# Altium PCB MB1367.PcbDoc (part 3 of 6)
Units mm, origin at the board's own origin, x right, y up, seen from the top; angles counter-clockwise.
Board outline 70 x 82.5 mm, 4 copper layers (Top Layer, Signal Layer 1, Signal Layer 2, Bottom Layer), stack 1.614 mm thick; 187 components, 143 nets, 802 pads, 920 vias.
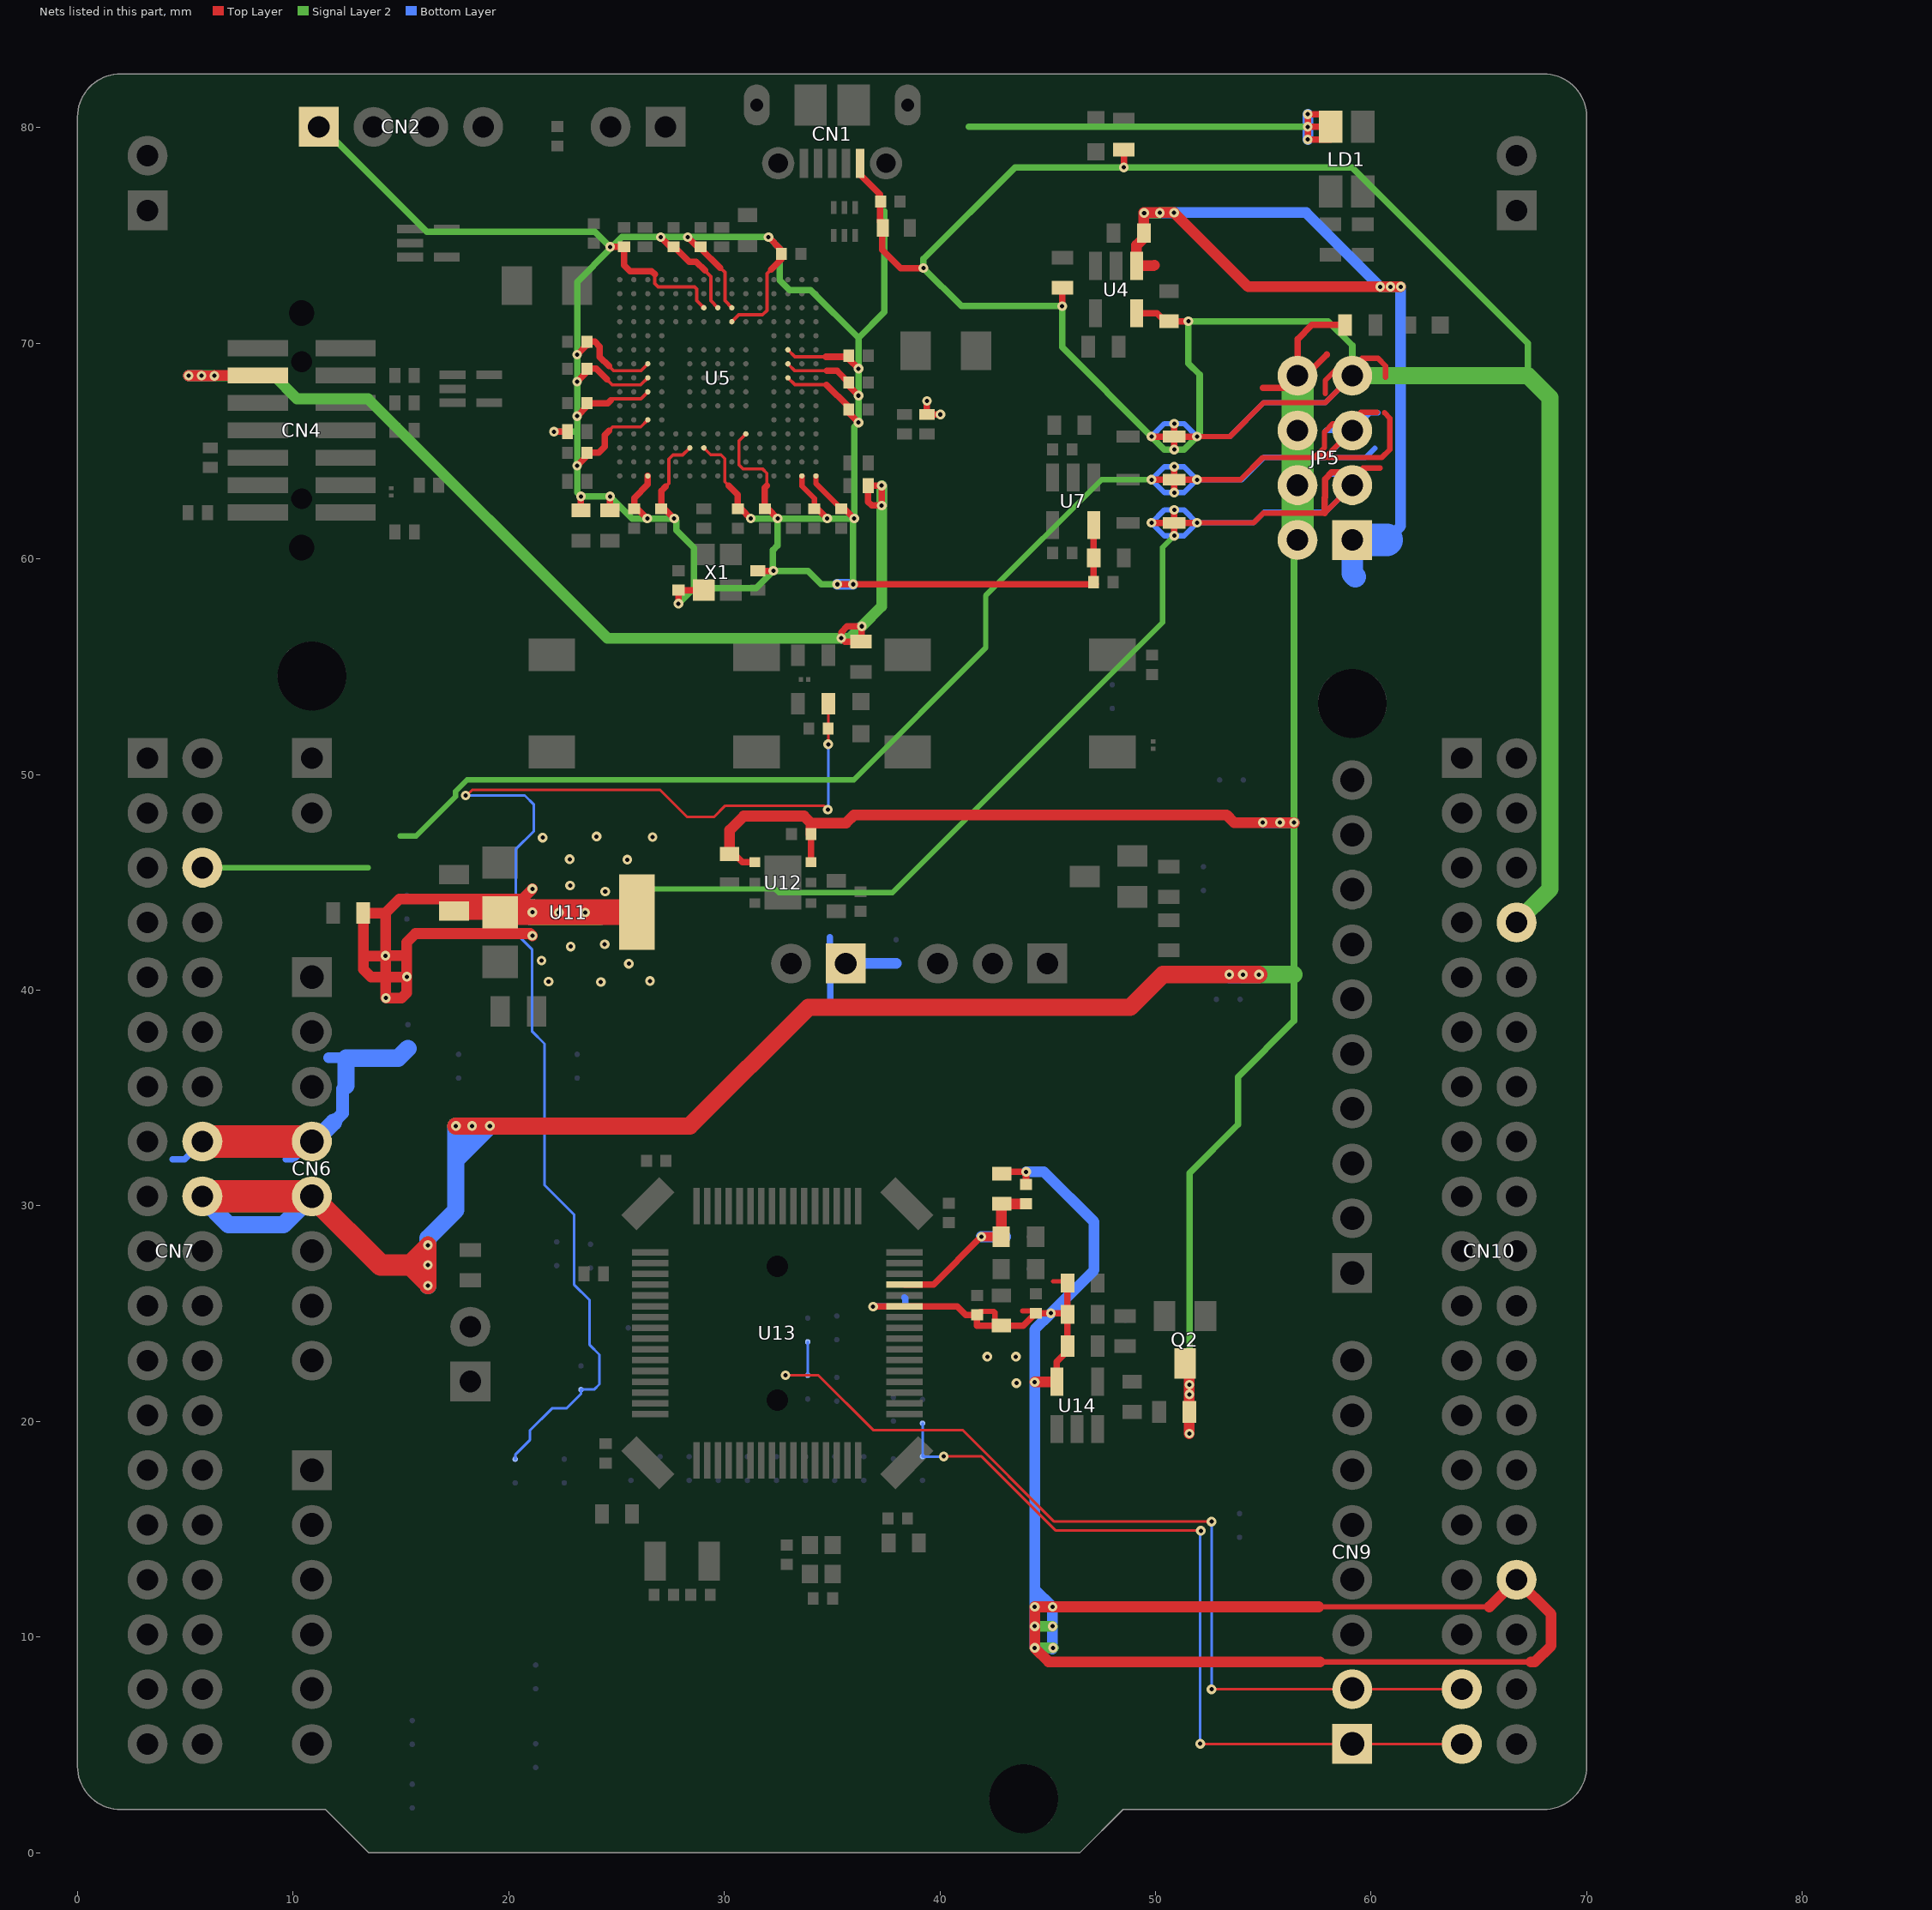
[diagram p4: the nets of this part, all layers, seen from the top]

## Via types
v1: diameter 0.45, hole 0.2, Top Layer to Bottom Layer, tented both sides, 920 vias

## Nets (pads, with @x,y where several pads share a name; then routed paths per layer and width w, separated by ;. In a path a pad name is that pad's centre, name@x,y a point inside that pad or via, vN(x,y) a via of type N, cw(c..) or ccw(c..) an arc to the next point about the centre after c; other vN are vias at no path point) (continued)
3V3_STLK: (continued)
  Top Layer w0.25: U5.P1@33.6,63.85 33.6,63.375 34.175,62.8 C26.2@34.175,62.325 ; U5.R1@34.25,63.85 34.25,63.5 C27.2@35.425,62.325
  Top Layer w0.3: v1(22.1,65.9) R14.1@22.725,65.9 ; v1(23.175,64.325) 23.625,64.775 C21.2@23.625,64.925 24.175,64.925 24.45,65.2 24.45,65.75 24.65,65.95 ; v1(23.175,66.625) 23.625,67.075 C17.2@23.625,67.225 24.6,67.225 24.725,67.35 ; v1(23.175,68.225) 23.625,68.675 C15.2@23.625,68.825 24.05,68.825 24.55,68.325 ; v1(23.175,69.475) C13.2@23.625,69.925 ; C28.2@23.35,62.25 v1(23.35,62.9) ; C13.2@23.675,69.925 C13.2@23.625,69.925 ; 24.65,68.95 24.225,69.375 24.225,69.85 24,70.075 C13.2@23.625,70.075 C13.2@23.625,69.925 ; C29.2@24.7,62.25 v1(24.7,62.9) ; v1(24.7,74.475) C6.2@25.35,74.475 25.35,73.625 25.625,73.35 26.625,73.35 26.775,73.2 ; v1(26.425,61.875) 25.975,62.325 C22.2@25.825,62.325 25.825,62.825 26.45,63.45 U5.C1@26.45,63.85 ; v1(27.05,74.925) 27.5,74.475 C7.2@27.65,74.475 ; 27.275,63.35 27.075,63.15 C23.2@27.075,62.325 27.225,62.325 v1(27.675,61.875) ; C7.2@27.65,74.45 27.7,74.45 28.375,73.775 28.7,73.775 29.1,73.375 ; v1(27.875,57.925) C32.2@27.875,58.55 X1.4@29.05,58.55 ; v1(28.3,74.925) 28.75,74.475 C8.2@28.9,74.475 28.9,74.4 29.8,73.5 ; 30.2,63.4 30.625,62.975 C24.2@30.625,62.325 30.775,62.325 v1(31.225,61.875) ; R24.1@31.55,59.45 v1(32.275,59.45) ; 31.975,63.4 31.875,63.3 C25.2@31.875,62.325 32.025,62.325 v1(32.475,61.875) ; v1(32.05,74.925) 32.65,74.325 C9.2@32.65,74.15 32.65,73.9 32.175,73.425 ; C26.2@34.175,62.325 34.325,62.325 v1(34.775,61.875) ; 34.725,69.375 35.725,69.375 C14.2@35.775,69.425 35.775,69.275 v1(36.225,68.825) ; 34.745,68.08 35.775,67.05 C18.2@35.775,66.925 35.775,66.775 v1(36.225,66.325) ; 34.75,68.725 35.225,68.725 C16.2@35.775,68.175 35.775,68.025 v1(36.225,67.575) ; v1(35.238,58.825) v1(35.975,58.825) 47.23,58.825 C33.2@47.13,58.925 C31.2@47.13,60.05 U7.5@47.13,61.575 ; C27.2@35.425,62.325 35.575,62.325 v1(36.025,61.875) ; v1(57.06,80.04) v1@57.065,80.04 ; LD1.4@58.12,80.04 v1@57.065,80.04 ; LD1.4@58.125,79.45 v1(57.065,79.45) v1@57.065,80.04 ; LD1.4@58.125,80.625 v1(57.065,80.625) v1@57.065,80.04
  Signal Layer 2 w0.3: CN2.1@11.19,80.04 11.335,80.04 16.2,75.175 24,75.175 v1(24.7,74.475) v1@24.7,74.375 ; v1(22.1,65.9) 23.15,65.9 23.175,65.875 ; v1(27.875,57.925) 28.6,58.65 ; v1(31.225,61.875) v1(32.475,61.875) ; 37.425,76.125 37.425,71.45 36.225,70.25 ; 41.34,80.04 v1(57.06,80.04) ; 23.175,65.875 v1(23.175,66.625) v1(23.175,68.225) v1(23.175,69.475) 23.175,72.85 v1@24.7,74.375 ; 23.175,65.875 v1(23.175,64.325) 23.175,63.075 v1(23.35,62.9) v1(24.7,62.9) 25.725,61.875 v1(26.425,61.875) v1(27.675,61.875) 27.785,61.765 27.785,61.335 28.6,60.52 28.6,58.65 ; v1@24.7,74.375 25.25,74.925 v1(27.05,74.925) v1(28.3,74.925) v1(32.05,74.925) 32.575,74.4 32.575,72.925 33.025,72.475 34,72.475 36.225,70.25 ; 28.6,58.65 31.475,58.65 v1(32.275,59.45) ; v1(32.275,59.45) 33.875,59.45 34.5,58.825 v1(35.238,58.825) v1(35.975,58.825) 35.975,61.825 v1(36.025,61.875) ; v1(32.275,59.45) 32.255,59.47 32.255,60.405 32.475,60.625 v1(32.475,61.875) ; v1(32.475,61.875) v1(34.775,61.875) v1(36.025,61.875) ; v1(36.025,61.875) 36.025,66.125 v1(36.225,66.325) v1(36.225,67.575) v1(36.225,68.825) 36.225,70.25
  Bottom Layer w0.5: v1(35.238,58.825) v1(35.975,58.825) ; v1(57.065,79.45) v1(57.065,80.625)
5V: C36.2 C37.2 CN6.5 CN7.18 JP5.2 JP5.4 JP5.6 JP5.8 Q2.3 R7.2 R12.1 R35.2 U12.1 U12.6 | length 186.8
  Top Layer w0.3: C37.2@30.245,46.315 30.46,46.315 30.835,45.94 U12.1@31.42,45.94 ; U12.6@34.02,45.94 C36.2@34.02,47.24 ; v1(39.4,67.325) R12.1@39.4,66.7 v1(40.025,66.7) ; Q2.3@51.37,22.69 Q2.3@51.57,22.49 ; v1@51.57,19.43 v1(51.575,19.435) ; 54.975,67.925 56.015,67.925 JP5.8@56.59,68.5 ; 57.95,69.475 56.975,68.5 JP5.8@56.59,68.5 ; R7.2@58.8,70.85 57.25,70.85 56.59,70.19 JP5.8@56.59,68.5
  Top Layer w0.5: C37.2@30.245,46.315 30.245,47.42 30.9,48.075 33.7,48.075 34.02,47.755 ; C36.2@34.02,47.24 34.02,47.755 ; v1@51.57,19.43 R35.2@51.57,20.44 Q2.3@51.57,22.49 ; v1(56.425,47.775) 56.425,47.75 56.4,47.775 v1(55.775,47.775) v1(54.975,47.775) 53.65,47.775 53.3,48.125 36.015,48.125 35.645,47.755 34.02,47.755
  Top Layer w0.8: v1(16.25,26.3) v1@16.25,26.325 ; v1(17.55,33.7) v1(18.3,33.7) v1(19.125,33.7) 28.4,33.7 33.9,39.2 48.825,39.2 50.35,40.725 v1(53.425,40.725) v1(54.05,40.725) v1(54.8,40.725) ; 15.325,27.25 v1@16.25,26.325 ; 15.325,27.25 v1(16.25,27.25) ; 15.325,27.25 v1(16.25,28.175) v1(16.25,27.25) ; v1@16.25,26.325 v1(16.25,27.25)
  Top Layer w1: CN6.5@10.87,30.44 14.06,27.25 15.325,27.25
  Top Layer w1.5: CN7.18@5.79,30.44 CN6.5@10.87,30.44
  Signal Layer 2 w0.3: v1(51.575,19.435) v1(51.575,21.25) v1(51.575,21.7) 51.575,31.525 53.825,33.775 53.825,35.975 56.425,38.575 56.425,40.725 v1(56.425,47.775) 56.425,60.715 JP5.2@56.59,60.88
  Signal Layer 2 w0.5: v1(55.775,47.775) v1(56.425,47.775)
  Signal Layer 2 w0.8: v1(16.25,26.3) v1(16.25,27.25) v1(16.25,28.175) ; v1(17.55,33.7) v1(18.3,33.7) v1(19.125,33.7) ; v1(54.05,40.725) v1(54.8,40.725) 56.425,40.725
  Signal Layer 2 w1.5: CN7.18@5.79,30.44 CN6.5@10.87,30.44 ; JP5.2@56.59,60.88 JP5.4@56.59,63.42 JP5.6@56.59,65.96 JP5.8@56.59,68.5
  Bottom Layer w0.3: v1(51.575,19.435) v1(51.575,21.25) v1@51.575,21.675
  Bottom Layer w0.5: v1(54.975,47.775) v1(55.775,47.775) v1(56.425,47.775)
  Bottom Layer w0.8: CN7.18@5.79,30.44 5.79,30.335 7,29.125 9.555,29.125 CN6.5@10.87,30.44 ; v1(16.25,26.3) v1(16.25,27.25) v1(16.25,28.175) 16.25,28.5 17.55,29.8 17.55,32.125 ; v1(53.425,40.725) v1(54.05,40.725) v1(54.8,40.725) ; 17.55,32.125 v1(19.125,33.7) v1(18.3,33.7) ; 17.55,32.125 17.55,32.95 ; 17.55,32.95 v1(18.3,33.7) ; 17.55,32.95 v1(17.55,33.7) v1(18.3,33.7)
5V_USB_CHGR: C2.2 C11.2 CN1.1 CN10.8 D1.1 JP5.7 R1.2 R6.2 U3.1 U4.5 | length 143.8
  Top Layer w0.25: v1(51.925,65.675) 53.45,65.675 55.025,67.25 57.88,67.25 JP5.7@59.13,68.5 ; 57.875,67.675 57.875,68.275 58.475,68.875 58.755,68.875 JP5.7@59.13,68.5 ; 60.675,68.425 60.675,68.95 60.325,69.3 59.575,69.3 59.13,68.855 JP5.7@59.13,68.5
  Top Layer w0.3: CN1.1@36.3,78.35 36.3,77.82 37.18,76.94 ; v1(39.235,73.49) 39.235,73.553 39.172,73.49 38.185,73.49 37.33,74.345 37.33,75.64 37.215,75.64 37.225,75.65 C2.2@37.225,76.845 ; v1(45.675,71.725) 45.685,71.735 R6.2@45.685,72.57 ; v1(48.533,78.158) R1.2@48.533,78.98 ; U4.5@49.125,71.395 50.08,71.395 50.455,71.02 C11.2@50.635,71.02 51.52,71.02 v1(51.525,71.025) ; v1(49.815,65.675) D1.1@50.87,65.675 ; v1(50.87,65.075) D1.1@50.87,65.675 ; v1(50.87,66.275) D1.1@50.87,65.675 ; v1(51.925,65.675) D1.1@50.87,65.675 ; 37.18,76.94 37.225,76.895 C2.2@37.225,76.845 ; 37.18,76.94 37.18,76.89 C2.2@37.225,76.845
  Signal Layer 2 w0.3: JP5.7@59.13,68.5 59.13,69.895 58,71.025 v1(51.525,71.025) 51.525,69.075 52.05,68.55 52.05,65.8 v1(51.925,65.675) 51.325,65.075 v1(50.87,65.075) 50.415,65.075 v1(49.815,65.675) 45.675,69.815 v1(45.675,71.725) 41,71.725 v1(39.235,73.49) 39.235,73.91 43.483,78.158 v1(48.533,78.158) 59.117,78.158 67.275,70 67.275,68.5
  Signal Layer 2 w0.8: JP5.7@59.13,68.5 67.275,68.5 68.3,67.475 68.3,44.69 CN10.8@66.75,43.14
  Bottom Layer w0.25: JP5.7@59.13,68.5 57.88,67.25 55.025,67.25 53.45,65.675 v1(51.925,65.675) ; v1(51.925,65.675) 51.325,65.075 v1(50.87,65.075) 50.415,65.075 v1(49.815,65.675) 50.415,66.275 v1(50.87,66.275) 51.325,66.275 v1(51.925,65.675)
5V_USB_STLK: C5.2 JP5.1 U4.1 | length 47.8
  Top Layer w0.3: C5.2@49.46,74.885 C5.2@49.46,75.12
  Top Layer w0.5: C5.2@49.46,74.885 49.125,74.55 U4.1@49.125,73.595 49.92,73.595 49.95,73.625 ; C5.2@49.46,75.12 49.46,76.06 v1(50.865,76.06) 54.3,72.625 v1(60.425,72.625) v1(60.9,72.625) v1(61.375,72.625)
  Signal Layer 2 w0.5: v1(49.475,76.045) 49.48,76.05 v1(50.2,76.05) 50.21,76.06 v1(50.865,76.06) ; v1(60.425,72.625) v1(60.9,72.625) v1(61.375,72.625)
  Bottom Layer w0.5: v1(49.475,76.045) 50.195,76.045 v1(50.2,76.05) 50.855,76.05 v1(50.865,76.06) 56.99,76.06 v1(60.425,72.625) v1(60.9,72.625) v1(61.375,72.625) 61.375,61.525 60.73,60.88
  Bottom Layer w1: JP5.1@59.13,60.88 59.13,59.32 59.275,59.175
  Bottom Layer w1.5: JP5.1@59.13,60.88 60.73,60.88
5V_VIN: C38.2 D3.1 JP5.3 R30.2 U11.2 U11.4 | length 107.8
  Top Layer w0.25: v1(51.925,61.675) 54.55,61.675 55.005,62.13 57.84,62.13 JP5.3@59.13,63.42 59.13,63.73 59.616,64.216 60.416,64.216 60.425,64.225
  Top Layer w0.3: v1(49.815,61.675) D3.1@50.87,61.675 ; v1(50.87,61.075) D3.1@50.87,61.675 ; v1(50.87,62.275) D3.1@50.87,61.675 ; v1(51.925,61.675) D3.1@50.87,61.675 ; 57.84,62.13 57.84,62.842 57.865,62.867 57.865,63.703 58.17,64.008 58.542,64.008 JP5.3@59.13,63.42
  Top Layer w0.5: v1(15.275,40.625) v1@15.265,40.615 ; v1(21.1,42.525) 21,42.625 15.675,42.625 15.265,42.215 15.265,41.575 ; v1(21.1,44.7) 20.625,44.225 14.925,44.225 14.285,43.585 ; 13.25,41.575 R30.2@13.25,43.575 14.275,43.575 14.285,43.585 ; 13.25,41.575 13.25,40.975 13.61,40.615 14.295,40.615 ; 13.25,41.575 14.265,41.575 v1(14.285,41.595) ; v1(14.285,41.595) 14.285,43.585 ; v1(14.285,41.595) 15.245,41.595 15.265,41.575 ; v1(14.285,41.595) 14.295,41.585 14.295,40.615 ; 14.295,40.615 14.295,39.645 v1(14.305,39.635) 15.035,39.635 15.265,39.865 v1@15.265,40.615 ; 14.295,40.615 v1@15.265,40.615 ; v1@15.265,40.615 15.265,41.575
  Top Layer w0.8: C38.2@17.47,43.665 19.545,43.665 U11.2@19.595,43.615
  Top Layer w1.2: U11.2@19.595,43.615 v1(21.1,43.615) U11.4@25.945,43.615
  Signal Layer 2 w0.25: 26.3,44.55 26.445,44.695 32.35,44.695 32.525,44.52 37.795,44.52 50.325,57.05 50.325,60.53 v1(50.87,61.075)
  Signal Layer 2 w1.2: v1(21.1,43.615) 21.115,43.6 v1(22.325,43.6) v1(23.55,43.6) 24.175,43.6
  Bottom Layer w0.25: 57.875,63.713 58.093,63.931 58.619,63.931 JP5.3@59.13,63.42 57.88,62.17 55.045,62.17 54.55,61.675 v1(51.925,61.675) ; v1(51.925,61.675) 51.325,61.075 v1(50.87,61.075) 50.415,61.075 v1(49.815,61.675) 50.415,62.275 v1(50.87,62.275) 51.325,62.275 v1(51.925,61.675)
  Bottom Layer w1.2: v1(21.1,43.615) 21.115,43.6 v1(22.325,43.6) v1(23.55,43.6) 24.175,43.6
  other v1: 24.275,40.375 21.85,40.4 26.55,40.425 25.575,41.225 21.525,41.375 22.875,42.025 24.45,42.125 24.475,44.575 22.85,44.85 25.5,46.05 22.825,46.075 21.575,47.075 26.675,47.1 24.075,47.125
AGND: C43.1 C44.1 C46.1 C47.1 C48.2 C49.2 C50.1 CN10.32 R34.1 SB11.2 U13.27 U14.5 | length 107.7
  Top Layer w0.2: 45.25,26.5 45.835,26.5 C46.1@45.92,26.415
  Top Layer w0.25: C49.2@41.72,24.94 41.88,25.1 42.5,25.1 42.55,25.05 42.55,24.735 C48.2@42.845,24.44 ; 43.85,25.125 44.335,25.125 C47.1@44.445,25.015 ; 57.575,11.4 65.49,11.4 ; 57.625,8.85 67.425,8.85
  Top Layer w0.3: v1(36.9,25.325) 36.915,25.34 40.81,25.34 41.21,24.94 C49.2@41.72,24.94 41.72,24.44 C48.2@42.845,24.44 43.87,24.44 C47.1@44.445,25.015 v1(45.15,25.015) 45.87,25.015 C50.1@45.92,24.965 ; C43.1@42.87,31.49 42.95,31.57 43.995,31.57 C44.1@43.995,30.99 ; U14.5@45.42,21.84 45.42,22.765 45.92,23.265 R34.1@45.92,23.49 C50.1@45.92,24.965 ; C46.1@45.92,26.415 C50.1@45.92,24.965
  Top Layer w0.5: v1(44.4,21.825) 44.415,21.84 U14.5@45.42,21.84 ; 57.575,11.4 v1(45.225,11.4) v1(44.4,11.4) v1(44.4,10.5) v1(44.4,9.5) 45.05,8.85 57.625,8.85 ; 65.49,11.4 CN10.32@66.75,12.66 68.35,11.06 68.35,9.6 67.6,8.85 67.425,8.85
  Signal Layer 2 w0.5: v1(44.4,9.5) v1(45.25,9.5) ; v1(44.4,10.5) v1(45.225,10.5) ; v1(44.4,11.4) v1(45.225,11.4)
  Bottom Layer w0.3: v1(36.9,25.325) 38.4,25.325 38.4,25.7 SB11.2@38.36,25.74
  Bottom Layer w0.5: v1(44,31.575) 44.825,31.575 47.15,29.25 47.15,27.015 v1(45.15,25.015) 44.4,24.265 v1(44.4,21.825) 44.4,12.225 ; v1@45.225,9.45 v1@45.225,9.5 ; v1(45.25,9.5) v1@45.225,9.5 ; v1(44.4,11.4) v1(44.4,10.5) v1(44.4,9.5) v1@45.225,9.5 ; v1(44.4,11.4) v1(45.225,11.4) ; v1(44.4,11.4) 44.4,12.225 ; 44.4,12.225 v1(45.225,11.4) ; v1@45.225,9.5 v1(45.225,10.5) v1(45.225,11.4)
  other v1: 43.55,21.775 42.2,23 43.525,23
ARD_D0_RX: CN9.1 CN10.37 SB19.2 SB22.2 | length 37.9
  Top Layer w0.12: v1(40.175,18.375) 41.936,18.375 45.361,14.95 52.1,14.95 52.1,14.928 v1(52.103,14.926) ; v1(52.075,5.05) 52.085,5.04 CN9.1@59.13,5.04 CN10.37@64.21,5.04
  Bottom Layer w0.12: SB19.2@39.195,19.915 SB22.2@39.195,18.365 40.165,18.365 v1(40.175,18.375) ; v1(52.075,5.05) 52.076,14.926 v1(52.103,14.926)
ARD_D1_TX: CN9.2 CN10.35 SB13.2 SB18.2 | length 44.5
  Top Layer w0.12: v1(32.835,22.14) 34.36,22.14 36.9,19.6 41.05,19.6 45.3,15.35 v1(52.6,15.35) ; v1(52.6,7.575) 59.125,7.575 CN9.2@59.13,7.58 CN10.35@64.21,7.58
  Bottom Layer w0.12: v1(32.835,22.14) SB18.2@33.87,22.14 SB13.2@33.87,23.69 ; v1(52.6,7.575) v1(52.6,15.35)
AVDD: C43.2 C44.2 L1.2 SB8.2 U13.29 | length 9.2
  Top Layer w0.3: U13.29@38.36,26.34 39.7,26.34 v1(41.925,28.565) ; C43.2@42.845,30.065 C43.2@42.87,30.09
  Top Layer w0.45: v1(41.925,28.565) L1.2@42.845,28.565
  Top Layer w0.5: L1.2@42.845,28.565 C43.2@42.845,30.065 ; C43.2@42.87,30.09 C44.2@43.995,30.09
  Bottom Layer w0.5: v1(41.925,28.565) SB8.2@43.045,28.565
B_USER: C35.2 R27.2 SB16.1 SB21.1 | length 60.7
  Top Layer w0.12: v1(18.001,49.027) 18.003,49.025 18.045,49.025 18.3,49.28 27.031,49.28 28.281,48.03 29.517,48.03 30.047,48.56 34.615,48.56 v1(34.8,48.375) ; v1(34.82,51.405) C35.2@34.82,52.14 R27.2@34.82,53.29
  Bottom Layer w0.12: v1(18.001,49.027) 20.749,49.027 21.17,48.606 21.17,47.379 20.32,46.529 20.32,42.65 21.075,41.895 21.075,38.1 21.665,37.51 21.665,30.96 23.025,29.6 23.025,26.35 23.755,25.62 23.755,23.547 24.21,23.092 24.21,21.725 23.96,21.475 SB16.1@23.35,21.475 23.35,21.275 22.675,20.6 22.007,20.6 20.98,19.573 20.98,19.13 20.3,18.45 SB21.1@20.3,18.25 ; v1(34.8,48.375) 34.8,48.45 34.82,48.47 v1(34.82,51.405)
E5V: CN7.6 D2.1 JP5.5 | length 90.6
  Top Layer w0.25: v1(51.925,63.675) 53.95,63.675 54.975,64.7 57.375,64.7 ; 57.825,64.875 57.935,64.765 ; 60.275,66.8 59.525,66.8 59.13,66.405 JP5.5@59.13,65.96 ; 60.625,66.775 60.875,66.525 60.875,65.075 60.5,64.7 58,64.7 57.935,64.765 ; 57.375,64.7 57.87,64.7 57.935,64.765 ; 57.375,64.7 57.84,65.165 57.84,65.89 58.225,66.275 58.815,66.275 JP5.5@59.13,65.96 ; 57.935,64.765 JP5.5@59.13,65.96
  Top Layer w0.3: v1(49.815,63.675) D2.1@50.87,63.675 ; v1(50.87,63.075) D2.1@50.87,63.675 ; v1(50.87,64.275) D2.1@50.87,63.675 ; v1(51.925,63.675) D2.1@50.87,63.675
  Signal Layer 2 w0.25: CN7.6@5.79,45.68 13.49,45.68 ; 14.955,47.145 15.701,47.145 17.531,48.975 17.531,49.222 18.069,49.76 36.01,49.76 42.125,55.875 42.125,58.3 47.5,63.675 v1(49.815,63.675)
  Bottom Layer w0.25: 57.9,65.95 57.91,65.96 JP5.5@59.13,65.96 ; 58.125,64.775 58.2,64.7 59.75,64.7 60.175,65.125 ; 60.325,66.775 59.945,66.775 JP5.5@59.13,65.96 ; v1(51.925,63.675) 51.325,63.075 v1(50.87,63.075) 50.415,63.075 v1(49.815,63.675) 50.415,64.275 v1(50.87,64.275) 51.325,64.275 v1(51.925,63.675) ; v1(51.925,63.675) 54,63.675 55.035,64.71 57.88,64.71 JP5.5@59.13,65.96